# Allegro board rpi-picow-r3-2.brd
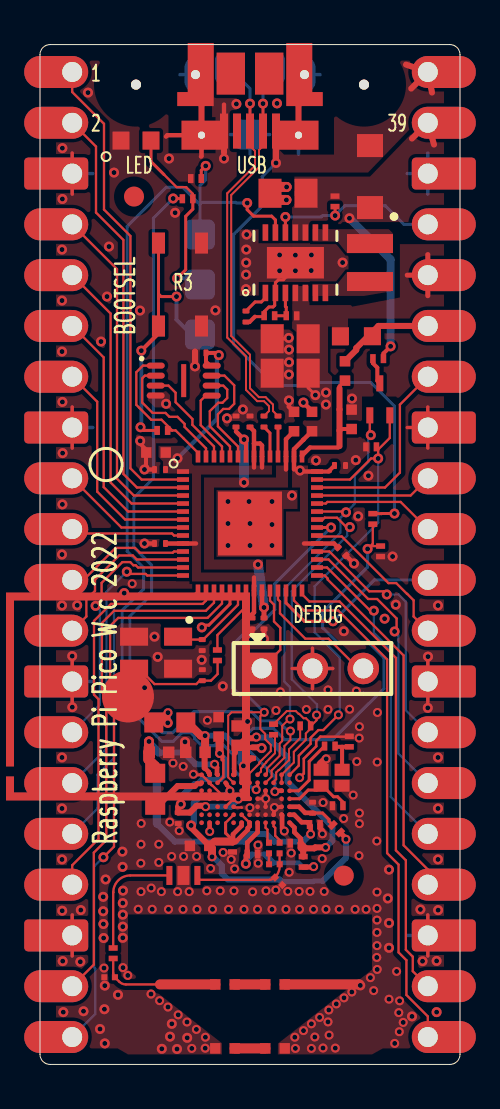
[diagram p0: board, top side]
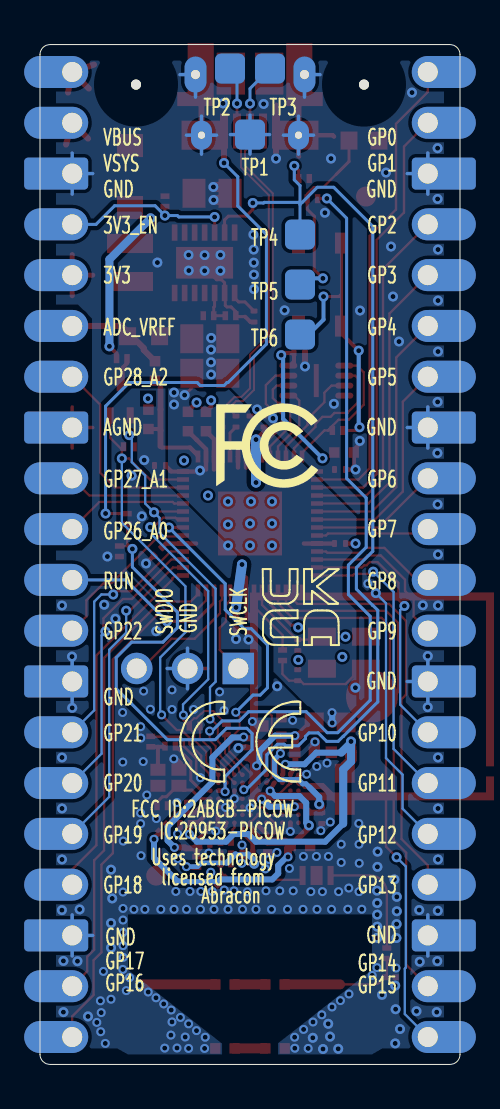
[diagram p1: board, bottom side, seen from below]

Outline 21 x 51 mm; copper layers: TOP, GNDT, GNDB, BOTTOM. Coordinates in mm from the lower left corner of the outline.
Outline path: 0,50.5 0,0.5 arc(0.15,0.15) 0.5,0 20.5,0 arc(20.85,0.15) 21,0.5 21,50.5 arc(20.85,50.85) 20.5,51 0.5,51 arc(0.15,50.85) 0,50.5

## Design rules (mm)
constraint set DEFAULT: min track width 0.1, pair gap 0.1
net group USB: nets USB_DM USB_DP
nets with their own width: min track width 0.115; nets GPIO0 GPIO1 GPIO2 GPIO3 GPIO4 GPIO5 GPIO6 GPIO7 GPIO8 GPIO9 GPIO10 GPIO11 GPIO12 GPIO13 GPIO14 GPIO15 GPIO16 GPIO17 GPIO18 GPIO19 GPIO20 GPIO21 GPIO22 GPIO26_ADC0 GPIO27_ADC1 GPIO28_ADC2 N1248345 N1248352 N1283798 N1286133 N1327876 N2601398 N2601406 N2601542 N2601582 N2601656 N2601706 N2601714 N2606814 N2606818 N2606882 N2610223 N2612153 N2624340 QSPI_SCLK QSPI_SD0 QSPI_SD1 QSPI_SD2 QSPI_SD3 QSPI_SS RUN SWCLK SWDIO WL_CLK WL_GPIO1 WL_GPIO2 XIN XOUT XR
nets with their own width: min track width 0.145; nets USB_DMX USB_DPX
nets with their own width: nets BT_PAVDD VDDBAT VSYS
nets with their own width: min track width 0.23; nets SR_VLX VIN_LDO VOUT_3P3

## Placement (name value [footprint] x y rotation side)
C1  47u  [CAPC2012]  12.4 43.57 180 top
C2  47u  [CAPC2012]  12.51 36.29 180 top
C4  100n  [M0603_PICO]  6 29.75 180 top
C5  100n  [M0603_PICO]  6 26.05 180 top
C6  100n  [M0603_PICO]  15.1 25.65 315 top
C7  100n  [M0603_PICO]  15 29.95 0 top
C8  100n  [M0603_PICO]  10.6 22.05 270 top
C9  100n  [M0603_PICO]  11.2 22.05 270 top
C10  100n  [M0603_PICO]  10.5 32.15 90 top
C11  100n  [M0603_PICO]  9.8 32.15 90 top
C12  2.2u  [CAPC1005]  12.7 32.15 90 top
C13  2.2u  [CAPC1005]  15.58 32.26 90 top
C14  2.2u  [CAPC1005]  13.6 32.15 90 top
C15  100n  [M0603_PICO]  8.02 35.58 180 top
C16  15p  [M0603_PICO]  8.11 20.97 270 top
C17  15p  [M0603_PICO]  8.12 19.46 90 top
C18  2.2u  [CAPC1005]  5.8 30.6 180 top
C20  100n  [M0603_PICO]  10.3 37.4 270 top
C21  47u  [CAPC2012]  12.51 34.57 180 top
C240  4.7u  [CAPC1005X55N]  7.77 15.61 180 top
C241  4.7u  [CAPC1005X55N]  5.95 15.61 0 top
C242  1u  [CAPC0603]  13.74 12 0 top
C243  4.7u  [CAPC1005X55N]  9.86 16.44 90 top
C244  1u  [CAPC0603]  12.77 11.06 180 top
C245  1u  [CAPC0603]  10.63 10.52 0 top
C246  2.2u  [CAPC1005]  7.98 10.93 180 top
C247  NF  [RF0603]  11.93 9.16 135 top
C248  2.2u  [CAPC1005]  8.93 16.88 90 top
C249  10p  [RF0603]  11.98 10.82 90 top
C250  10p  [RF0603]  11.72 10.01 180 top
C251  100n  [M0603_PICO]  13.63 12.84 90 top
C252  1u  [CAPC0603]  9.63 10.88 270 top
C255  100n  [M0603_PICO]  6.91 12.32 270 top
C256  100n  [M0603_PICO]  10.63 15.58 90 top
C257  18p  [SONY0603]  14.88 12.93 180 top
C258  18p  [SONY0603]  15.47 16.14 90 top
C260  XpF  [CAPC1005]  11.75 0.8 180 top
C261  XpF  [CAPC1005]  11.75 4 0 top
C262  XpF  [CAPC1005]  9.25 4 180 top
C271  XpF  [CAPC1005]  9.25 0.8 180 top
C272  NF  [RF0603]  3.48 4.36 180 top
D1  MBR120VLSFT1G  [SOD123FL]  16.5 44.4 90 top
D2  Green  [AVAGO_QSM]  4.8 46.2 0 top
FB8  600@100MHz  [CAPC1608X90N]  6.49 17.1 0 top
FB9  600@100MHz  [SONY0603]  14.82 11.79 135 top
FL1  LFB212G45CG7D227  [FILS3_MUR_LFB21XXCG2Q]  7.17 9.45 0 top
J0  CON_PICO_40W-notfitted  [CON_PICO_40W]  10.5 25.5 0 top
J1  690-005-298-486  [FCI_10103594-0001LF]  10.5 49.5 180 top
J2  CON_PICO_3W-notfitted  [BLKCON100VHTM1SQSW1003]  11.08 19.8 0 top
L1  1u  [BOURNS_SRN2512]  16.5 40.1 270 top
L8  2.2u  [CAPC1608X90N]  5.76 13.76 90 top
L9  4.7n  [RF0603]  11.45 10.82 90 top
MH1  Mounting Hole  [MH_M2_PTH_SYM]  4.8 2 0 top
MH2  Mounting Hole  [MH_M2_PTH_SYM]  16.2 2 0 top
NOREF  -  []  0.55 0 90 top
NOREF#2  -  [unnamed#2]  4.7 43.4 0.1 top
NOREF#3  -  []  -0.79 3.11 90 top
NOREF#4  -  []  0.15 8.2 90 top
NOREF#5  -  []  -15 87 0 top
NOREF#6  -  []  65 0 0 top
NOREF#7  -  [unnamed#3]  16.2 49 0 top
NOREF#8  -  []  15.2 49 90 top
NOREF#9  -  []  1.61 1.37 90 top
NOREF#10  -  []  13.62 19.8 0 top
NOREF#11  -  []  0 50.5 0 top
NOREF#12  -  []  -0.79 0.57 0 top
NOREF#13  -  []  2.41 3.91 0 top
NOREF#14  -  []  21.49 39.47 0 top
NOREF#15  -  []  2.32 7.22 0 top
NOREF#16  -  []  1.61 49.63 0 top
NOREF#17  -  []  64 31 0 top
NOREF#18  -  []  -0.79 0.57 90 top
NOREF#19  -  []  2.21 14.6 0 top
NOREF#20  -  []  4.8 49 0 top
NOREF#21  -  []  -0.79 0.57 0 top
NOREF#22  -  []  19.89 34.39 0 top
NOREF#23  -  [unnamed#2]  15.19 9.44 0.1 top
NOREF#24  -  []  0 1.35 0 top
NOREF#25  -  []  5.2 1.03 0 top
NOREF#26  -  []  0 0 90 top
NOREF#27  -  []  1.61 34.39 90 top
NOREF#28  -  []  16.2 0 90 top
NOREF#29  -  [unnamed#2]  4.8 49 0 top
NOREF#30  -  []  17.5 0 90 top
NOREF#31  -  []  6.5 51.1 0 top
NOREF#32  -  []  -0.79 2.17 90 top
NOREF#33  -  []  12.9 51 90 top
NOREF#34  -  []  36.22 -0.1 180 bottom
Q1  DMG1012T  [SOT50P160X90-3N]  16.99 33.26 90 top
R1  10K  [SONY0603]  17.03 25.66 270 top
R2  100K  [RESC0603]  14.75 43.16 270 top
R3  470R  [SONY0603]  7.38 43.29 0 top
R5  20K  [SONY0603]  16.91 35.3 180 top
R6  10K  [SONY0603]  16.56 30.88 180 top
R7  200R  [RESC1608]  15.82 36.41 0 top
R8  100K  [RESC0603]  7.8 44.3 180 top
R9  1R  [RESC1005]  15.25 34.68 270 top
R10  10K  [SONY0603]  16.64 27.28 270 top
R11  1K  [SONY0603]  6.12 31.7 0 top
R12  27R  [M0603_PICO]  11.2 32.15 270 top
R13  27R  [M0603_PICO]  11.9 32.15 270 top
R14  1K  [SONY0603]  8.87 20.46 270 top
R20  100K  [RESC0603]  11.47 37.44 180 top
R21  560K  [RESC0603]  12.57 37.44 180 top
R80  22R  [SONY0603]  13.16 10.13 270 top
R81  220R  [SONY0603]  14.49 15.92 180 top
R86  0R  [SONY0603]  3.66 5.56 90 top
R87  470R  [SONY0603]  13.27 16.93 0 top
R88  10K  [SONY0603]  11.68 16.75 90 top
SH1  SHJJ-031306  [RF_SHIELD_PICOW]  4.4 8 0 top
SW1  TP-1221U-K9K5325  [TONEPARTS_TP-1221U-K9K5325]  7 39 90 top
TP1  SQ1P5MM  [TP_SMT_1P5X1P5MM]  10.5 46.5 180 bottom
TP2  SQ1P5MM  [TP_SMT_1P5X1P5MM]  11.5 49.8 180 bottom
TP3  SQ1P5MM  [TP_SMT_1P5X1P5MM]  9.5 49.8 180 bottom
TP4  SQ1P5MM  [TP_SMT_1P5X1P5MM]  8 41.5 180 bottom
TP5  SQ1P5MM  [TP_SMT_1P5X1P5MM]  8 39 180 bottom
TP6  SQ1P5MM  [TP_SMT_1P5X1P5MM]  8 36.5 180 bottom
U1  RP2040  [RPI_RP2040]  10.5 27.05 0 top
U2  RT6154AGQW  [RT-WDFN-14AL]  12.77 40.09 90 top
U3  W25Q16JVUXIQ  [USON_2X3MM]  7.18 34.2 0 top
U19  CYW43439KUBG  [BROADCOM_BCM43438]  10.28 13.28 90 top
X1  12MHz  [XTAL320X250X100]  5.8 20.59 180 top
X2  37.4MHz  [XTALS4_1M6X1M2]  14.58 14.34 90 top

## Library data of the parts
C1 C2 C4-C18 C20 C21 C244 C245 C255 C256 = CAP_MLCC
C240 C241 C243 = CAP_1005_6.3V_4.7u
C242 C252 = CAP_0603_4V_1u
C246 C248 = CAP_1005_6V3_2.2u
C247 C272 = CAP_0603_NF
C249 C250 C260-C262 C271 = CAP_0603_25V_10p
C251 = CAP_0603_6.3V_100n
C257 C258 = CAP_0603_25V_27p
D1 = DIODE_SCHOTTKY
D2 = LED_2PIN
FB8 = FB_1608_600R
FB9 = FB_0603_600R
FL1 = FILT_LFB212G45CG7D227
J0 = CON_PICO_40W
J1 = CON_uUSB_B
J2 = CON_PICO_3W
L1 = INDUCTOR
L8 = IND_CHIP_2.2U_1608
L9 = IND_CHIP_4N7_0603
MH1 MH2 = Mounting Hole
Q1 = MOSFET_N
R1-R3 R5-R14 R20 R21 R87 = RES_CHIP
R80 = RES_0603_22R
R81 R86 R88 = RES_0603_220R
SH1 = SHIELDCAN_1PIN
SW1 = SW_PB_4PIN
TP1-TP6 = TP_SMT_SQUARERC_1P5MM
U1 = RPI_RP2040
U2 = RT6154B
U3 = WINBOND_W25X_QSPI_FLASH_USON
U19 = BCM43438KUBG
X1 = CRYSTAL_4P
X2 = XTAL_SMT_1P6X1P2_37.4MHZ

## Footprints (pads in the part's own frame, mm; a bottom-side part is the same pattern mirrored in y, then rotated)
AVAGO_QSM
  rect 0.85x0.9 smd: 1(-0.75,0) 2(0.75,0)
BLKCON100VHTM1SQSW1003
  rect 1.575x1.575 hole 1: 1(0,0)
  round 1.575 hole 1: 2(2.54,0) 3(5.08,0)
BOURNS_SRN2512
  rect 0.95x2.3 smd: 1(-0.95,0) 2(0.95,0)
BROADCOM_BCM43438
  round 0.235 smd: A1(-1.2,2.2) A2(-0.8,2.2) A5(0.4,2.2) A6(0.8,2.2) A7(1.2,2.2) B1(-1.2,1.8) B2(-0.8,1.8) B4(0,1.8) B5(0.4,1.8) B6(0.8,1.8) B7(1.2,1.8) C1(-1.2,1.4) C2(-0.8,1.4) C3(-0.4,1.4) C4(0,1.4) C6(0.8,1.4) C7(1.2,1.4) D2(-0.8,1) D3(-0.4,1) D4(0,1) D6(0.8,1) E1(-1.2,0.6) E2(-0.8,0.6) E3(-0.4,0.6) E6(0.8,0.6) E7(1.2,0.6) F1(-1.2,0.2) F2(-0.8,0.2) F5(0.4,0.2) F6(0.8,0.2) F7(1.2,0.2) G1(-1.2,-0.2) G2(-0.8,-0.2) G4(0,-0.2) G6(0.8,-0.2) H1(-1.2,-0.6) H2(-0.8,-0.6) H3(-0.4,-0.6) H4(0,-0.6) H6(0.8,-0.6) H7(1.2,-0.6) J1(-1.2,-1) J2(-0.8,-1) J3(-0.4,-1) J5(0.4,-1) J6(0.8,-1) J7(1.2,-1) K1(-1.2,-1.4) K2(-0.8,-1.4) K6(0.8,-1.4) L2(-0.8,-1.8) L3(-0.4,-1.8) L4(0,-1.8) L5(0.4,-1.8) L6(0.8,-1.8) L7(1.2,-1.8) M1(-1.2,-2.2) M2(-0.8,-2.2) M3(-0.4,-2.2) M4(0,-2.2) M5(0.4,-2.2) M6(0.8,-2.2) M7(1.2,-2.2)
CAPC0603
  rect 0.275x0.45 smd: 1(-0.262,0) 2(0.262,0)
CAPC1005
  rect 0.52x0.53 smd: 1(-0.485,0) 2(0.485,0)
CAPC1005X55N
  rect 0.57x0.58 smd: 1(-0.485,0) 2(0.485,0)
CAPC1608X90N
  rect 0.95x1 smd: 1(-0.8,0) 2(0.8,0)
CAPC2012
  rect 1.15x1.45 smd: 1(-0.9,0) 2(0.9,0)
CON_PICO_40W
  oval 3.2x1.6 hole 1: 1(-8.89,24.13) 2(-8.89,21.59) 4(-8.89,16.51) 5(-8.89,13.97) 6(-8.89,11.43) 7(-8.89,8.89) 9(-8.89,3.81) 10(-8.89,1.27) 11(-8.89,-1.27) 12(-8.89,-3.81) 14(-8.89,-8.89) 15(-8.89,-11.43) 16(-8.89,-13.97) 17(-8.89,-16.51) 19(-8.89,-21.59) 20(-8.89,-24.13) 21(8.89,-24.13) 22(8.89,-21.59) 24(8.89,-16.51) 25(8.89,-13.97) 26(8.89,-11.43) 27(8.89,-8.89) 29(8.89,-3.81) 30(8.89,-1.27) 31(8.89,1.27) 32(8.89,3.81) 34(8.89,8.89) 35(8.89,11.43) 36(8.89,13.97) 37(8.89,16.51) 39(8.89,21.59) 40(8.89,24.13)
  rrect 3.2x1.6 hole 1: 3(-8.89,19.05) 8(-8.89,6.35) 13(-8.89,-6.35) 18(-8.89,-19.05) 23(8.89,-19.05) 28(8.89,-6.35) 33(8.89,6.35) 38(8.89,19.05)
FCI_10103594-0001LF
  rect 1.42x2.1 smd: (-0.96,-0.05) (0.96,-0.05)
  rect 0.4x1.75 smd: 1(-1.3,2.825) 2(-0.65,2.825) 3(0,2.825) 4(0.65,2.825) 5(1.3,2.825)
  custom 2x1.45 hole 1.05x0.65: 6(-2.425,3.03) 8(2.425,3.03)
  custom 1.825x3.15 hole 0.7x1.4: 7(-2.725,0) 9(2.725,0)
FILS3_MUR_LFB21XXCG2Q
  rect 0.6x0.95 smd: G(0,0)
  rect 0.3x0.95 smd: I(-0.7,0) O(0.7,0)
M0603_PICO
  rrect 0.25x0.35 smd: 1(-0.275,0) 2(0.275,0)
MH_M2_PTH_SYM
  round 0 hole 2.1: 1(0,0)
RESC0603
  rect 0.275x0.45 smd: 1(-0.262,0) 2(0.262,0)
RESC1005
  rect 0.52x0.53 smd: 1(-0.485,0) 2(0.485,0)
RESC1608
  rect 0.85x0.9 smd: 1(-0.8,0) 2(0.8,0)
RF0603
  rect 0.3x0.3 smd: 1(-0.265,0) 2(0.265,0)
RF_SHIELD_PICOW
  custom 12.2x10.4 smd: 1(0,10.4)
RPI_RP2040
  rect 0.6x0.23 smd: 1(-3.35,2.6) 2(-3.35,2.2) 3(-3.35,1.8) 4(-3.35,1.4) 5(-3.35,1) 6(-3.35,0.6) 7(-3.35,0.2) 8(-3.35,-0.2) 9(-3.35,-0.6) 10(-3.35,-1) 11(-3.35,-1.4) 12(-3.35,-1.8) 13(-3.35,-2.2) 14(-3.35,-2.6) 29(3.35,-2.6) 30(3.35,-2.2) 31(3.35,-1.8) 32(3.35,-1.4) 33(3.35,-1) 34(3.35,-0.6) 35(3.35,-0.2) 36(3.35,0.2) 37(3.35,0.6) 38(3.35,1) 39(3.35,1.4) 40(3.35,1.8) 41(3.35,2.2) 42(3.35,2.6)
  rect 0.23x0.6 smd: 15(-2.6,-3.35) 16(-2.2,-3.35) 17(-1.8,-3.35) 18(-1.4,-3.35) 19(-1,-3.35) 20(-0.6,-3.35) 21(-0.2,-3.35) 22(0.2,-3.35) 23(0.6,-3.35) 24(1,-3.35) 25(1.4,-3.35) 26(1.8,-3.35) 27(2.2,-3.35) 28(2.6,-3.35) 43(2.6,3.35) 44(2.2,3.35) 45(1.8,3.35) 46(1.4,3.35) 47(1,3.35) 48(0.6,3.35) 49(0.2,3.35) 50(-0.2,3.35) 51(-0.6,3.35) 52(-1,3.35) 53(-1.4,3.35) 54(-1.8,3.35) 55(-2.2,3.35) 56(-2.6,3.35)
  rect 3.2x3.2 smd: 57(0,0)
RT-WDFN-14AL
  rect 0.82x0.28 smd: 1(-1.51,1.5) 2(-1.51,1) 3(-1.51,0.5) 4(-1.51,0) 5(-1.51,-0.5) 6(-1.51,-1) 7(-1.51,-1.5) 8(1.51,-1.5) 9(1.51,-1) 10(1.51,-0.5) 11(1.51,0) 12(1.51,0.5) 13(1.51,1) 14(1.51,1.5)
  rect 1.58x2.85 smd: 15(0,0)
SOD123FL
  rect 1.15x1.3 smd: 1(-1.55,0) 2(1.55,0)
SONY0603
  rect 0.275x0.45 smd: 1(-0.262,0) 2(0.262,0)
SOT50P160X90-3N
  rect 0.8x0.35 smd: 1(-0.8,0.5) 2(-0.8,-0.5) 3(0.8,0)
TONEPARTS_TP-1221U-K9K5325
  rect 1.05x0.65 smd: 1(-2.075,1.075) 2(2.075,1.075) 3(-2.075,-1.075) 4(2.075,-1.075)
TP_SMT_1P5X1P5MM
  rrect 1.5x1.5 smd: 1(0,0)
unnamed#2
  round 1 smd: (0,0)
unnamed#3
  round 0.5 hole 2.1 unplated: (0,0)
USON_2X3MM
  oval 0.9x0.3 smd: 1(-1.4,0.75) 2(-1.4,0.25) 3(-1.4,-0.25) 4(-1.4,-0.75) 5(1.4,-0.75) 6(1.4,-0.25) 7(1.4,0.25) 8(1.4,0.75)
  rect 0.25x1.65 smd: 9(0,0)
XTAL320X250X100
  rect 1.4x0.9 smd: 1(-1.1,-0.8) 2(1.1,-0.8) 3(1.1,0.8) 4(-1.1,0.8)
XTALS4_1M6X1M2
  rect 0.6x0.75 smd: 1(-0.4,0.525) 2(-0.4,-0.525) 3(0.4,-0.525) 4(0.4,0.525)

## Nets
1V1: C9.1 C11.1 C12.1 U1.23 U1.45 U1.50
3V3: C2.1 C4.1 C5.1 C6.1 C7.1 C8.1 C10.1 C14.1 C15.1 C18.1 C21.1 FB8.1 J0.36 R7.1 R21.1 U1.1 U1.10 U1.22 U1.33 U1.42 U1.44 U1.48 U1.49 U2.4 U2.5(VOUTB) U3.8
3V3_EN: J0.37 R2.2 U2.12
GND: C1.2 C2.2 C4.2 C5.2 C6.2 C7.2 C8.2 C9.2 C10.2 C11.2 C12.2 C13.2 C14.2 C15.2 C16.2 C17.2 C18.2 C20.2 C21.2 C240.2 C241.2 C242.2 C243.2 C244.2 C245.2 C246.2 C247.1 C248.2 C251.2 C252.2 C255.2 C256.2 C257.2 C258.2 C260.1 C261.2 C271.2 C272.2 D2.1(CATHODE) FL1.G J0.3 J0.8 J0.13 J0.18 J0.23 J0.28 J0.33 J0.38 J1.5 J1.6 J1.7 J1.8 J1.9(SH4) J2.2 MH1.1 MH2.1 R1.2 R6.2 R8.2 R20.2 SH1.1 SW1.3 SW1.4(P4) TP1.1 U1.19 U1.57 U2.2 U2.15 U3.4 U19.A7 U19.B1 U19.B6 U19.D4 U19.E3 U19.G2 U19.H2 U19.H3 U19.H4 U19.J2 U19.J3 U19.J5 U19.K2 U19.L2 U19.L3 U19.L4 X1.2 X1.4(GND2) X2.2 X2.4(GND2)
VBUS: D1.2 J0.40 J1.1 R10.1
VDDBAT: C240.1 C256.1 FB8.2 U19.B7 U19.F6 U19.F7
VIN_LDO: C241.1 C242.1 L8.2 U19.C7 U19.M2
ADC_AVDD: C13.1 R9.2 U1.43
ADC_VREF: J0.35 R7.2 R9.1
BT_PAVDD: C245.1 R80.2 U19.H1
GPIO0: J0.1 U1.2
GPIO1: J0.2 U1.3
GPIO2: J0.4 U1.4
GPIO3: J0.5 U1.5
GPIO4: J0.6 U1.6
GPIO5: J0.7 U1.7
GPIO6: J0.9(P9) U1.8
GPIO7: J0.10 U1.9
GPIO8: J0.11 U1.11
GPIO9: J0.12 U1.12
GPIO10: J0.14 U1.13
GPIO11: J0.15 U1.14
GPIO12: J0.16 U1.15
GPIO13: J0.17 U1.16
GPIO14: J0.19 U1.17
GPIO15: J0.20 U1.18
GPIO16: J0.21 U1.27
GPIO17: J0.22 U1.28
GPIO18: J0.24 U1.29
GPIO19: J0.25 U1.30
GPIO20: J0.26 U1.31
GPIO21: J0.27 U1.32
GPIO22: J0.29 U1.34
GPIO26_ADC0: J0.31 U1.38
GPIO27_ADC1: J0.32 U1.39
GPIO28_ADC2: J0.34 U1.40
QSPI_SCLK: U1.52 U3.6
QSPI_SD0: U1.53 U3.5
QSPI_SD1: U1.55 U3.2
QSPI_SD2: U1.54 U3.3(W\P\_IO2)
QSPI_SD3: U1.51 U3.7
QSPI_SS: R11.2 U1.56 U3.1
RUN: J0.30 U1.26
SR_VLX: L8.1 U19.A6
SWCLK: J2.1 U1.24
SWDIO: J2.3(P3) U1.25
USB_DM: J1.2 R13.1 TP2.1
USB_DMX: R13.2 U1.46
USB_DP: J1.3 R12.1 TP3.1
USB_DPX: R12.2 U1.47
VOUT_3P3: C243.1 C244.1 R80.1 U19.E7 U19.M1
VOUT_CORE: C248.1 C255.1 U19.C6 U19.D3 U19.G4
VOUT_LN: C246.1 C252.1 FB9.1 U19.D6 U19.E2 U19.F1 U19.F2 U19.G1
VSYS: C1.1 D1.1(K) J0.39 R2.1 R5.1 U2.10 U2.11
WL_CLK: Q1.2(S) R6.1 U1.41 U19.M7
WL_CS: Q1.1 U1.37 U19.J7
WL_D: R87.2 R88.2 U1.36 U19.L6 U19.L7
WL_GPIO0: R3.1 U19.J6
WL_GPIO1: R8.1 TP4.1 U2.13 U19.H6
WL_GPIO2: R1.1 R10.2 U19.L5
WL_ON: U1.35 U19.E6 U19.G6
XIN: C16.1 U1.20 X1.1
XOUT: R14.1 U1.21(XOUT)
XR: C17.1 R14.2 X1.3
XTAL_VDD: C251.1 FB9.2 U19.M3(XTAL_VDD_1P2)
N1248345: L1.1 U2.8 U2.9
N1248352: L1.2 U2.6 U2.7
N1283798: D2.2 R3.2 TP5.1
N1286133: Q1.3 R5.2
N1327876: R11.1 SW1.1 SW1.2 TP6.1
N2601398: C247.2 C249.1 C250.1 FL1.O(OUT)
N2601406: C249.2 U19.K1
N2601542: C250.2 L9.1
N2601582: L9.2 U19.J1
N2601656: C257.1 U19.M4 X2.1
N2601706: C258.1 R81.1 X2.3
N2601714: R81.2 U19.M5
N2606814: C261.1 C262.1
N2606818: C262.2 C272.1 R86.1
N2606882: C260.2 C271.1
N2610223: C20.1 U2.1
N2612153: R20.1 R21.2 U2.3
N2624340: FL1.I R86.2
N2651978: R87.1 U19.K6
N2652088: R88.1 U19.H7

Pads without a net: J1 4; U2 14; U3 9; U19 A1 A2 A5 B2 B4 B5 C1 C2 C3 C4 D2 E1 F5 M6

## Via types
v1: diameter 0.5, hole 0.25, TOP to BOTTOM, 171 vias
v2: diameter 0.45, hole 0.25, TOP to BOTTOM, 151 vias

## Routing (per net, layer and track width the routed paths; a pad name or vN(x,y) marks a point on that pad's centre or on a via; arc(x,y) is an arc through that point)
1V1: length 9.5
  TOP w0.15: C11.1 9.8,31.65
  TOP w0.2: U1.50 10.3,31.15 v1(10.2,31.25) ; v1(11.2,22.85) 11.1,22.95
  TOP w0.22: 12.3,29.75 U1.45 12.3,31.27 12.7,31.66 C12.1 ; 11.1,22.95 U1.23 ; 9.8,31.65 v1(10.2,31.25)
  TOP w0.25: C9.1 v1(11.2,22.85)
  BOTTOM w0.5: v1(10.9,25) v1(11.2,22.85) ; v1(10.2,31.25) v1(10.2,29.1)
3V3: length 26.9
  TOP w0.15: C21.1 13.41,33.83 v1(13.77,33.47)
  TOP w0.2: U3.8 8.5,34.95 8.3,35.15 C15.1 8.77,35.58 8.88,35.47 v1(8.94,35.47) ; U1.42 14.42,29.65 14.44,29.66 14.49,29.66 14.49,29.71 C7.1
  TOP w0.22: C10.1 10.5,31.88 10.7,31.68 10.7,31.05 ; 10.7,24.35 U1.22 10.7,22.6 10.6,22.5 C8.1 ; 10.7,31.05 11,31.05 11.1,30.95 U1.48 11.1,29.85 ; 10.7,31.05 U1.49 10.7,29.85 ; 7.8,26.05 U1.10 C5.1 ; 12.7,29.75 U1.44 12.7,30.77 13.17,31.23 13.17,31.24 13.6,31.66 13.6,31.66 C14.1 ; U1.42 13.2,29.65 ; C6.1 14.7,26.05 U1.33 13.2,26.05
  TOP w0.25: J0.36 19.39,40.5 ; J0.36 18.36,39.47 ; J0.36 19.39,38.44
  TOP w0.3: 5.79,17.21 5.96,17.37 ; 5.96,17.37 6.26,17.37 ; 5.96,17.37 5.99,17.4 6.21,17.4 v2(6.4,17.59)
  TOP w0.5: v2(6.39,17.08) 6.26,17.21 6.26,17.37 ; FB8.1 5.79,17.21
  BOTTOM w0.2: v1(6.88,30.31) 8.85,32.28 8.85,35.38 v1(8.94,35.47)
  BOTTOM w0.3: v2(6.39,17.08) 6.39,17.58 v2(6.4,17.59)
  vias: v1(13,29.7) v1(14.3,33.6) v1(14.3,33)
3V3_EN: length 9
  TOP w0.15: R2.2 14.76,42.89 v1(14.76,42.45) ; U2.12 v1(12.27,42.38)
  BOTTOM w0.15: J0.37 18.2,42.01 17.27,42.94 15.24,42.94 v1(14.76,42.45) 14.13,42.45 14.06,42.38 v1(12.27,42.38)
GND: length 179.4
  TOP w0.12: 10.09,12.84 10.08,12.85 9.71,12.85 U19.E3 ; U19.D4 8.6,13.97 8.58,13.97 ; U19.B6 8.08,14.49
  TOP w0.127: v2(12.98,14.34) 13.19,14.55 13.19,15.29 13.81,15.91 13.81,16.18 14.02,16.39 15.45,16.39 C258.2 ; U19.B6 8.48,14.06 8.58,13.97
  TOP w0.15: 11.28,13.28 v2(11.29,13.29) ; 11.28,13.28 U19.J3 ; 11.28,13.28 U19.J5 ; 11.28,13.28 U19.H4 ; C2.2 12.21,36.29 12.21,36.3 12.41,36.3 v1(12.44,36.33) ; 7.69,14.49 8.08,14.49 U19.A7 ; 10.74,37.39 11.16,37.39 R20.2 11.21,37.64 11.45,37.88 11.65,37.88 11.74,37.96 11.74,38.55 U2.2 11.77,39.09 11.92,39.24 12.17,39.24 12.44,39.51 12.44,39.76 U2.15 ; U1.19 9.5,23.03 8.44,21.96 8.2,21.96 v1(8.09,21.85)
  TOP w0.17: 1.61,18.12 J0.13 1.61,20.18 ; 19.39,18.12 J0.28 19.39,20.18 ; 1.61,43.52 J0.3 1.61,45.58 ; 19.39,5.42 J0.23 19.39,7.48 ; J0.33 19.39,32.88 ; J0.33 19.39,30.82 ; J0.33 18.36,31.85 ; J1.8 8.83,46.47 ; J1.8 8.08,45.52 ; J1.8 6.37,46.47 ; 12.61,19.8 J2.2 ; J2.2 13.62,18.78 ; J2.2 14.64,19.8 ; J2.2 13.62,20.82 ; 1.61,30.82 J0.8 1.61,32.88 ; 1.61,7.48 J0.18 1.61,5.42
  TOP w0.178: 14.41,2.63 14.41,2.75 v2(14.44,2.72) ; 12.08,11.76 12.17,11.67 v2(12.22,11.67)
  TOP w0.2: 11.77,12.84 U19.L3 ; 5.3,29.86 5.3,30.58 C18.2 5.32,30.73 5.01,31.04 v1(5.01,31.18) ; U19.K2 11.68,12.49 11.72,12.8 ; C20.2 10.47,37.12 10.74,37.39
  TOP w0.22: 6.3,46.4 6.37,46.47 8.07,46.47 8.07,45.43 8.05,45.4 ; C4.2 v1(5.22,29.75) ; 15.6,25.15 C6.2 ; C12.2 12.45,32.89 v1(12.45,33.2) ; v1(13.17,33.1) 13.6,32.67 C14.2 ; J1.5 9.2,48 ; C5.2 v1(5.22,26.05)
  TOP w0.23: U19.B1 8.48,11.65 v2(8.48,11.65) ; U19.L2 12.08,12.49 12.1,12.46 12.1,11.79
  TOP w0.25: v2(14.12,11.53) 14.12,11.67 14.11,11.68 14.11,11.7 14,11.81 C242.2 ; C9.2 v1(11.2,21.27) ; v1(10.57,21.25) 10.6,21.27 C8.2
  TOP w0.3: v1(7.75,34.9) C15.2 7.75,35.65 ; 5.3,29.86 5.32,29.84 v1(5.22,29.75) ; 8.07,46.47 8.07,49.2 7.77,49.5 J1.9 ; 8.07,46.47 J1.8 ; 8.07,46.47 8.28,46.67 J1.5 9.2,45.6 ; v1(11.08,15.82) 11.03,15.82 11.02,15.83 10.95,15.83 10.92,15.86 C256.2 ; 13.04,46.59 J1.6 12.93,49.2 J1.7
  TOP w0.4: X2.4 14.06,15.03 v2(14.31,15.28)
  TOP w0.5: C261.2 15.96,4 v2(16.02,3.95) ; 7.25,15.79 v2(7.25,16.13) ; v1(12.33,43.88) 11.81,43.88 C1.2 11.83,43.23 v1(12.32,43.23)
  GNDT w0.12: J0.13 2.59,19.15 ; J0.13 1.61,20.13 ; J0.13 1.61,18.17 ; 1.61,43.57 J0.3 ; J0.3 2.59,44.55 ; J0.3 1.61,45.53 ; 1.61,30.87 J0.8 ; J0.8 2.59,31.85 ; J0.8 1.61,32.83 ; J0.38 19.39,45.53 ; J0.38 19.39,43.57 ; J0.38 18.41,44.55 ; J0.33 19.39,32.83 ; J0.33 19.39,30.87 ; J0.33 18.41,31.85 ; J1.8 8.78,46.47 ; J1.8 8.08,47.37 ; J1.8 8.08,45.57 ; J1.8 7.37,46.47 ; J1.6 13.63,46.47 ; J1.6 12.22,46.47 ; J1.6 12.93,45.57 ; J1.6 12.93,47.37 ; 7.05,49.5 J1.9 ; J1.9 7.78,48.42 ; J1.9 8.5,49.5 ; 18.41,6.45 J0.23 ; J0.23 19.39,7.43 ; J0.23 19.39,5.47 ; 19.39,18.17 J0.28 ; J0.28 18.41,19.15 ; J0.28 19.39,20.13 ; 1.61,5.47 J0.18 ; J0.18 1.61,7.43 ; J0.18 2.59,6.45 ; 13.62,18.83 J2.2 ; J2.2 14.59,19.8 ; J2.2 13.62,20.77 ; J2.2 12.66,19.8 ; 13.22,48.42 J1.7 ; J1.7 13.95,49.5 ; J1.7 12.5,49.5
  GNDB w0.12: 19.39,43.57 J0.38 ; J0.38 18.41,44.55 ; J0.38 19.39,45.53 ; J0.3 1.61,45.53 ; J0.3 1.61,43.57 ; J0.3 2.59,44.55 ; 12.5,49.5 J1.7 ; J1.7 13.95,49.5 ; J1.7 13.22,48.42 ; J0.8 2.59,31.85 ; J0.8 1.61,32.83 ; J0.8 1.61,30.87 ; J0.13 1.61,20.13 ; J0.13 1.61,18.17 ; J0.13 2.59,19.15 ; J0.18 1.61,7.43 ; J0.18 1.61,5.47 ; J0.18 2.59,6.45 ; 19.39,18.17 J0.28 ; J0.28 19.39,20.13 ; J0.28 18.41,19.15 ; 8.08,45.57 J1.8 ; J1.8 7.37,46.47 ; J1.8 8.78,46.47 ; J1.8 8.08,47.37 ; 18.41,6.45 J0.23 ; J0.23 19.39,5.47 ; J0.23 19.39,7.43 ; 12.66,19.8 J2.2 ; J2.2 13.62,20.77 ; J2.2 14.59,19.8 ; J2.2 13.62,18.83 ; 12.93,45.57 J1.6 ; J1.6 12.22,46.47 ; J1.6 12.93,47.37 ; J1.6 13.63,46.47 ; 7.78,48.42 J1.9 ; J1.9 8.5,49.5 ; J1.9 7.05,49.5
  BOTTOM w0.15: 14.25,15.34 v2(14.31,15.28)
  BOTTOM w0.17: 9.52,46.5 TP1.1 ; TP1.1 10.5,47.48 ; TP1.1 10.5,45.52 ; TP1.1 11.48,46.5 ; 1.61,43.52 J0.3 ; J0.3 1.61,45.58 ; J0.3 2.64,44.55 ; J0.23 19.39,7.48 ; J0.23 19.39,5.42 ; J0.23 18.36,6.45 ; J0.8 1.61,32.88 ; J0.8 2.64,31.85 ; J0.8 1.61,30.82 ; 12.17,46.47 J1.6 ; J1.6 12.93,45.52 ; J1.6 12.93,47.42 ; J1.6 13.68,46.47 ; 7,49.5 J1.9 7.78,48.37 ; 1.61,18.12 J0.13 ; J0.13 2.64,19.15 ; J0.13 1.61,20.18 ; 8.08,45.52 J1.8 ; J1.8 8.08,47.42 ; J1.8 8.83,46.47 ; J1.8 7.32,46.47 ; 1.61,5.42 J0.18 1.61,7.48 ; J0.38 19.39,45.58 ; J0.38 18.36,44.55 ; J0.38 19.39,43.52 ; 13.22,48.37 J1.7 14,49.5 ; 19.39,20.18 J0.28 19.39,18.12 ; J2.2 14.64,19.8 ; J2.2 13.62,20.82 ; J2.2 13.62,18.78
  vias: v1(1.12,45.82) v1(1.12,43.28) v1(1.1,40.75) v1(1.1,38.2) v1(1.1,35.65) v1(1.12,33.13) v1(1.13,30.57) v1(1.12,28) v1(1.1,25.5) v1(1.1,22.95) v1(1.1,15.35) v1(1.1,12.8) v1(1.1,10.25) v1(1.11,7.68) v1(1.14,5.17) v1(1.17,2.61) v1(1.61,20.42) v1(1.61,17.87) v1(1.86,22.96) v1(2.04,7.72) v1(2.02,5.14) v1(2.17,2.66) v1(2.4,48.6) v1(3.05,36.15) v1(3,1.77) v1(3.16,8.38) v1(3.16,7.66) v1(3.17,7.02) v1(3.18,6.32) v1(3.24,3.94) v1(3.22,2.76) v1(3.24,1.05) v1(3.28,9.25) v1(3.35,38.4) v1(3.45,40.9) v1(3.7,44.6) v1(3.9,3.48) v1(4.12,10.64) v1(4.13,9.88) v1(4.14,8.07) v1(4.14,7.49) v1(4.14,6.89) v1(4.14,6.33) v1(4.15,8.69) v1(5,37.7) v1(5.23,18.84) v1(5.72,21.39) v1(5.88,20.38) v1(6.09,0.78) v1(6.3,33.03) v1(6.45,45.3) v1(6.5,1.39) v1(6.59,2.03) v1(6.75,42.59) v1(6.85,0.77) v1(7.36,1.33) v1(8.09,20.23) v1(8.77,37.71) v1(9.14,18.91) v1(9.2,45.3) v1(9.35,32.31) v1(9.4,28.15) v1(9.4,27.05) v1(9.4,25.95) v1(9.82,48.03) v1(10.14,32.76) v1(10.33,41.5) v1(10.31,40.75) v1(10.31,40.09) v1(10.3,39.49) v1(10.3,38.77) v1(10.45,28.15) v1(10.5,27.05) v1(10.5,25.95) v1(11.6,28.15) v1(11.6,27) v1(11.6,25.95) v1(11.85,48.06) v1(11.98,40.48) v1(11.98,39.69) v1(12.45,34.5) v1(12.45,35.74) v1(12.45,35.12) v1(12.6,28.45) v1(12.77,40.47) v1(12.77,39.69) v1(13.57,40.48) v1(13.56,39.7) v1(13.8,30.2) v1(15.13,40.1) v1(15.19,21.66) v1(15.6,33.3) v1(15.7,25.05) v1(15.79,30.22) v1(15.91,27.41) v1(16.42,29.44) v1(17.23,22.29) v1(17.45,9.74) v1(17.39,8.3) v1(17.45,7.07) v1(17.45,5.83) v1(17.63,25.4) v1(17.79,22.99) v1(18.6,2.4) v1(19.02,7.75) v1(19.13,5.16) v1(19.4,20.39) v1(19.39,17.83) v1(19.83,5.17) v1(19.83,2.61) v1(19.9,22.95) v1(19.9,15.35) v1(19.9,12.8) v1(19.9,10.25) v1(19.91,7.71) v2(3.2,4.82) v2(4.15,4.84) v2(4.39,4.45) v2(4.61,24.04) v2(4.91,7.76) v2(5.05,11.01) v2(5.04,10.06) v2(5.05,8.64) v2(5.06,12.05) v2(5.55,3.52) v2(5.56,8.82) v2(5.61,7.76) v2(5.94,11.01) v2(5.94,10.1) v2(5.98,3.19) v2(6.07,8.64) v2(6.42,7.76) v2(6.4,2.87) v2(6.49,12.12) v2(6.58,10.4) v2(6.65,15.07) v2(6.88,8.64) v2(6.91,2.48) v2(6.96,11.69) v2(7.16,14.9) v2(7.18,10.4) v2(7.15,7.76) v2(7.35,2.12) v2(7.46,8.64) v2(7.59,0.8) v2(7.67,14.51) v2(7.83,10.4) v2(7.82,1.75) v2(7.85,7.76) v2(8.34,8.68) v2(8.27,1.36) v2(8.26,0.81) v2(8.37,17.21) v2(8.53,9.8) v2(8.63,7.76) v2(9.01,8.68) v2(9.15,10.6) v2(9.42,7.76) v2(9.56,10.25) v2(9.73,9.78) v2(9.7,8.68) v2(10.2,7.76) v2(10.38,17.15) v2(10.5,12.84) v2(10.63,8.63) v2(10.9,10.97) v2(10.91,10.06) v2(10.88,7.76) v2(11.3,8.68) v2(11.6,7.76) v2(11.72,12.85) v2(11.8,17.7) v2(11.79,8.72) v2(12.02,18.63) v2(12.3,7.76) v2(12.39,8.65) v2(12.46,9.61) v2(12.56,10.57) v2(12.74,1.36) v2(12.77,0.8) v2(12.96,8.65) v2(12.98,7.76) v2(13.18,1.69) v2(13.32,17.75) v2(13.5,8.65) v2(13.57,2.03) v2(13.57,0.8) v2(13.68,7.76) v2(13.74,1.37) v2(13.98,2.35) v2(14.11,10.29) v2(14.15,13.1) v2(14.21,8.65) v2(14.15,0.82) v2(14.3,7.76) v2(14.4,18.73) v2(14.4,17.75) v2(14.4,2.12) v2(14.45,1.47) v2(14.82,3.02) v2(14.77,0.82) v2(14.96,7.76) v2(15.18,12.3) v2(15.2,3.33) v2(15.48,17.76) v2(15.59,3.62) v2(15.66,13.47) v2(15.82,18.67) v2(15.84,15.14) v2(15.76,7.76) v2(15.95,10.44) v2(15.97,16.89) v2(15.96,16.32) v2(15.97,12.57) v2(15.97,12.04) v2(16.3,7.76) v2(16.52,4.34) v2(16.68,3.69) v2(16.84,11.17) v2(16.84,5.35) v2(16.87,17.6) v2(16.86,15.12) v2(16.85,8.62) v2(16.85,7.8) v2(16.85,7.22) v2(16.85,6.6) v2(16.85,5.94) v2(16.86,4.75) v2(17.45,3.26) v2(17.73,1.05) v2(17.83,4.65) v2(17.94,2.59) v2(17.98,3.18) v2(17.96,1.64) v2(18.16,2.1)
VBUS: length 30.8
  TOP w0.15: v1(17.72,27.55) 17.08,27.55 17.08,27.54 R10.1
  TOP w0.3: J1.1 v1(11.8,45.08) ; J0.40 19.6,48.6 ; J0.40 18.56,48.8 ; J0.40 18.3,50
  BOTTOM w0.15: v1(17.72,27.55) 17.72,32.92 16.54,34.1 13.14,34.1 12.99,33.95 11.8,33.95 11.65,34.1 11.6,34.1 9.68,36.02 9.68,41.5 11.11,42.93 11.11,44.39 v1(11.8,45.08)
VDDBAT: length 7.8
  TOP w0.23: 8.23,14.83 8.44,14.62 8.44,14.58 8.48,14.54 U19.B7 8.48,14.49 ; U19.F6 U19.F7 10.08,14.84 ; C240.1 8.23,15.59
  TOP w0.25: 10.08,14.84 v2(10.17,14.93)
  TOP w0.3: C256.1 10.54,15.3 v2(10.17,14.93) ; 8.23,15.59 8.23,14.83
  TOP w0.4: 7.3,17.12 7.3,17.01 ; 7.3,17.01 7.47,17.01 8.04,16.44 v2(8.25,16.44) C240.1 ; 7.3,17.01 7.29,17.02 FB8.2
  BOTTOM w0.3: v2(10.17,14.93) 10.03,15.07 10.03,15.66 9.25,16.44 v2(8.25,16.44)
VIN_LDO: length 20.6
  TOP w0.23: v2(13.53,11.52) 13.53,11.94 C242.1 13.36,12.11 13.09,12.11 12.71,12.49 12.48,12.49 U19.M2 ; U19.C7 8.85,14.51 8.85,14.85 8.73,14.97 v2(8.73,15.01)
  TOP w0.3: C241.1 5.45,15.63 5.45,15.64
  TOP w0.5: L8.2 5.75,14.57 5.75,14.92 5.42,15.25 5.42,15.61 5.45,15.64 v1(5.45,16.15)
  BOTTOM w0.3: 5.84,12.04 6.74,11.14 10.21,11.14 10.59,11.52 11.32,11.52 11.7,11.14 13.15,11.14 v2(13.53,11.52) ; 5.94,15.59 7.19,15.59 7.77,15.01 v2(8.73,15.01)
  BOTTOM w0.4: v1(5.45,16.15) 5.45,16.08 ; 5.45,16.08 5.94,15.59 ; 5.45,16.08 5.45,15.14 5.84,14.75 5.84,12.04
ADC_AVDD: length 6.2
  TOP w0.15: 14.98,33.92 R9.2
  TOP w0.2: 14.98,30.92 14.91,30.85 13.5,30.85 ; 14.98,32.74 14.98,32.75 ; 14.98,33.81 14.98,33.92 ; C13.1 15.05,31.78 14.98,31.7
  TOP w0.22: 13.5,30.85 13.1,30.45 U1.43
  TOP w0.3: 14.98,30.92 14.98,33.81
ADC_VREF: length 5.1
  TOP w0.15: R9.1 15.38,35.3 ; 16.62,36.63 R7.2
  TOP w0.3: J0.35 16.92,36.93 16.62,36.63 15.81,35.82 15.81,35.73 15.38,35.3
BT_PAVDD: length 6.8
  TOP w0.23: U19.H1 10.88,11.61 10.36,11.09 C245.1 10.29,10.45 v1(10.29,10.04)
  TOP w0.25: v2(13.68,9.89) 13.66,9.87 R80.2
  BOTTOM w0.2: 11.23,10.51 10.6,10.51
  BOTTOM w0.23: v2(13.68,9.89) 13.12,9.89 12.93,10.08 11.66,10.08
  BOTTOM w0.3: 11.66,10.08 11.23,10.51 ; 10.6,10.51 10.29,10.2 v1(10.29,10.04)
GPIO0: length 23.9
  TOP w0.115: U1.2 5.08,29.25 4.52,29.81 4.52,41.43 3.2,42.75 3.2,47.04 1.61,48.63 J0.1
GPIO1: length 21.9
  TOP w0.115: J0.2 2.8,45.9 2.8,42.6 4.17,41.23 4.17,29.52 4.84,28.85 U1.3
GPIO2: length 17.3
  TOP w0.115: J0.4 3.85,39.77 3.85,29.29 4.69,28.45 U1.4
GPIO3: length 15.2
  TOP w0.115: U1.5 4.58,28.05 3.53,29.1 3.53,37.55 J0.5
GPIO4: length 13.2
  TOP w0.115: U1.6 4.41,27.65 3.18,28.87 3.18,35.35 J0.6
GPIO5: length 11.1
  TOP w0.115: U1.7 4.25,27.25 2.86,28.65 2.86,33.14 J0.7
GPIO6: length 6.6
  TOP w0.115: J0.9 4.07,26.85 U1.8
GPIO7: length 5.7
  TOP w0.115: J0.10 1.83,26.55 6.6,26.55 6.7,26.45 U1.9
GPIO8: length 6.3
  TOP w0.115: J0.11 2.18,24.23 3.78,25.83 4.75,25.83 4.99,25.59 6.64,25.59 6.7,25.65 U1.11
GPIO9: length 8
  TOP w0.115: J0.12 2.32,22.4 2.32,23.25 2.75,23.68 2.75,24.24 3.96,25.45 4.64,25.45 4.84,25.25 U1.12
GPIO10: length 12.9
  TOP w0.115: U1.13 4.9,24.85 4.79,24.96 4.67,24.96 4.51,25.12 4.12,25.12 3.08,24.08 3.08,23.23 v1(2.78,22.93)
  BOTTOM w0.115: J0.14 2.99,17.99 2.99,22.72 v1(2.78,22.93)
GPIO11: length 14.6
  TOP w0.115: U1.14 5.36,24.45 5.28,24.53 4.45,24.53 v1(4.34,24.64)
  BOTTOM w0.115: v1(4.34,24.64) 4.33,24.64 3.32,23.63 3.32,15.78 J0.15
GPIO12: length 16.9
  TOP w0.115: U1.15 7.9,23.66 7.75,23.51 4.27,23.51 v1(4.21,23.57)
  BOTTOM w0.115: v1(4.21,23.57) 3.7,23.06 3.7,15.32 2.87,14.49 2.87,12.79 J0.16
GPIO13: length 20.4
  TOP w0.115: J0.17 1.61,9.96 2.93,11.28 2.93,18.26 2.7,18.49 2.7,22.18 3.55,23.03 8.13,23.03 8.3,23.2 U1.16
GPIO14: length 25.6
  TOP w0.115: J0.19 2.69,4.99 2.69,10.59 3.31,11.22 3.31,18.41 3.1,18.63 3.1,22.07 3.71,22.68 8.29,22.68 8.7,23.09 U1.17
GPIO15: length 28.3
  TOP w0.115: U1.18 9.1,23.05 8.38,22.33 3.91,22.33 3.5,21.93 3.5,18.78 3.7,18.58 3.7,10.89 v1(3.17,10.36)
  BOTTOM w0.115: J0.20 2.76,2.52 2.76,4.79 2.71,4.84 2.71,9.9 v1(3.17,10.36)
GPIO16: length 26.1
  TOP w0.115: U1.27 12.7,23.2 13.2,22.7 14.91,22.7 17.36,20.25 17.36,10.56 17.93,9.99 17.93,5.6 18.32,5.21 18.32,3.47 19.39,2.4 J0.21
GPIO17: length 23.3
  TOP w0.115: J0.22 18.64,4.66 18.64,5.39 18.29,5.73 18.29,10.21 17.8,10.71 17.8,20.33 14.98,23.15 13.46,23.15 13.1,23.52 U1.28
GPIO18: length 18
  TOP w0.115: U1.29 14.23,24.45 14.38,24.3 14.38,24.25 18.18,20.45 18.18,10.96 19.39,9.75 J0.24
GPIO19: length 16
  TOP w0.115: v1(16.69,22.69) 16.65,22.73 16.47,22.73 14.35,24.85 U1.30
  BOTTOM w0.115: J0.25 17.54,13.38 17.54,20.74 16.69,21.59 v1(16.69,22.69)
GPIO20: length 14.2
  TOP w0.115: v1(17.73,21.65) 17.83,21.75 17.83,22.3 16.86,23.27 16.41,23.27 14.43,25.25 U1.31
  BOTTOM w0.115: J0.26 17.92,15.54 17.92,21.46 v1(17.73,21.65)
GPIO21: length 12.5
  TOP w0.115: v1(17.34,23.5) 17.18,23.66 16.46,23.66 14.47,25.65 U1.32
  BOTTOM w0.115: J0.27 18.29,17.71 18.29,23.14 17.93,23.5 v1(17.34,23.5)
GPIO22: length 8
  TOP w0.115: U1.34 13.85,26.4 15.09,26.4 17.42,24.07 17.81,24.07 18.35,23.53 18.36,23.53 18.68,23.21 18.68,22.4 J0.29
GPIO26_ADC0: length 6.1
  TOP w0.115: J0.31 18.03,28.13 14.37,28.13 14.29,28.05 U1.38
GPIO27_ADC1: length 5.9
  TOP w0.115: J0.32 18.53,28.45 U1.39
GPIO28_ADC2: length 9.8
  TOP w0.115: U1.40 17.25,28.85 17.99,29.59 17.99,33 J0.34
QSPI_SCLK: length 5.1
  TOP w0.115: U1.52 9.5,30.9 8.49,31.91 8.49,32.67 8.92,33.09 9.12,33.09 9.36,33.33 9.36,33.75 9.16,33.95 U3.6
QSPI_SD0: length 3.9
  TOP w0.115: U1.53 9.1,30.9 8.04,31.97 8.04,33.2 8.29,33.44 U3.5
QSPI_SD1: length 6.6
  TOP w0.115: U3.2 5.25,34.44 5.11,34.31 5.11,33.1 5.63,32.58 6.28,32.58 6.47,32.38 6.88,32.38 7.23,32.03 7.23,31.88 8.3,30.81 U1.55
QSPI_SD2: length 5.1
  TOP w0.115: U1.54 8.7,30.9 7.62,31.98 7.62,32.27 6.78,33.12 6.78,33.59 6.43,33.95 U3.3
QSPI_SD3: length 5.8
  TOP w0.115: U1.51 9.9,30.9 8.9,31.91 8.9,32.52 9.16,32.78 9.45,32.78 9.71,33.03 9.71,33.96 9.23,34.44 U3.7
QSPI_SS: length 7.2
  TOP w0.115: 6.6,31.7 6.78,31.7 7.19,31.3 7.9,30.58 U1.56 ; 6.6,31.7 6.6,31.71 6.07,32.24 5.56,32.24 4.96,32.84 4.82,32.98 4.82,34.62 5.14,34.95 U3.1 ; 6.6,31.7 R11.2
RUN: length 8.9
  TOP w0.15: U1.26 12.3,23.08 13.22,22.16 v1(14.65,22.16)
  BOTTOM w0.15: J0.30 16.72,24.23 v1(14.65,22.16)
SR_VLX: length 2.8
  TOP w0.23: 8.03,14.04 U19.A6
  TOP w0.25: 8.03,14.04 7.86,14.04 7.74,13.92
  TOP w0.3: 7.74,13.92 6.88,13.92 5.92,12.96 L8.1
SWCLK: length 4.5
  TOP w0.115: J2.1 12.01,20.73 12.01,21.84 11.7,22.15 11.7,22.99 11.5,23.19 U1.24
SWDIO: length 6.5
  TOP w0.115: U1.25 11.9,23.25 12,23.15 12,22.55 13.26,21.29 14.42,21.29 15.91,19.8 J2.3
USB_DM: length 19.3
  TOP w0.1: J1.2 11.15,45.93 10.95,45.73 10.95,44.87 9.56,43.48 9.56,36.43 10.5,35.49 10.5,33.81 10.94,33.37 11.28,33.37 11.65,33 11.65,32.68 R13.1
  TOP w0.145: v1(11.15,48.05) J1.2
  BOTTOM w0.145: TP2.1 11.15,49.45 v1(11.15,48.05)
USB_DMX: length 1.5
  TOP w0.145: U1.46 R13.2
USB_DP: length 19.6
  TOP w0.1: R12.1 11.45,32.68 11.45,32.92 11.2,33.17 10.86,33.17 10.3,33.73 10.3,35.41 9.36,36.35 9.36,43.56 10.75,44.95 10.75,45.68 10.57,45.86 10.57,46.6 J1.3
  TOP w0.145: J1.3 v1(10.5,48.05)
  BOTTOM w0.145: TP3.1 10.5,48.8 v1(10.5,48.05)
USB_DPX: length 1.6
  TOP w0.145: U1.47 11.5,31.57 R12.2
VOUT_3P3: length 13.6
  TOP w0.23: U19.M1 12.72,11.84 12.72,11.61 13.03,11.3 C244.1 ; U19.E7 9.68,14.49 9.71,14.49 9.71,15.55 9.75,15.59
  TOP w0.3: R80.1 13.16,10.69 13.03,10.82 C244.1 13.29,10.8 13.71,10.8 13.76,10.85 v2(14.28,10.85) ; 9.86,15.87 9.75,15.76 9.75,15.59 ; 9.86,15.87 C243.1 ; 9.86,15.87 10.3,16.31 10.76,16.31 v2(10.82,16.37)
  BOTTOM w0.3: v2(14.28,10.85) 14.62,11.19 14.62,11.89 12.38,14.13 12.38,15.35 11.38,16.35 10.84,16.35 v2(10.82,16.37)
VOUT_CORE: length 11.9
  TOP w0.12: U19.C6 9.17,14.37 9.17,15.19 9.12,15.24
  TOP w0.127: v2(9.91,13.27) 9.83,13.19 9.58,13.19 U19.D3
  TOP w0.2: v2(8.98,15.55) 9.12,15.41 9.12,15.24
  TOP w0.23: U19.G4 9.93,13.28 v2(9.91,13.27)
  TOP w0.3: v2(8.28,12.89) 8.23,12.93 7.83,12.93 7.49,12.6 C255.1 6.91,12.88 v1(7.04,13.01)
  TOP w0.4: C248.1 8.93,16.36 8.98,16.31 v2(8.98,15.55)
  BOTTOM w0.25: v2(8.98,15.55) 9.28,15.25 9.28,14.49 9.03,14.24 8.07,14.24 7.86,14.03 7.7,14.03 7.52,13.85
  BOTTOM w0.3: v2(9.91,13.27) 9.53,12.89 v2(8.28,12.89) ; 7.52,13.85 7.04,13.37 v1(7.04,13.01)
VOUT_LN: length 21.3
  TOP w0.12: 9.28,12.09 9.68,12.49 ; U19.F2 U19.G1
  TOP w0.129: 9.68,12.49 U19.E2
  TOP w0.15: 9.63,11.22 9.28,11.57 9.28,12.09 ; 9.63,11.22 C252.1 ; 9.63,11.22 9.75,11.1
  TOP w0.2: U19.D6 9.34,14.03 9.34,13.97 9.49,13.81 v2(9.49,13.68)
  TOP w0.23: 9.63,11.16 C252.1 ; 9.63,11.16 9.82,11.16 10.39,11.73 10.39,11.82 10.48,11.91 U19.G1 ; 9.63,11.16 9.65,11.17 9.65,11.5 10.08,11.93 U19.F1
  TOP w0.25: v2(15.3,11.26) 15.3,11.3 FB9.1
  TOP w0.3: v1(7.56,11.95) 7.56,11.84 C246.1 8.68,11.15 8.76,11.15
  TOP w0.4: C246.1 8.6,10.79 v2(8.6,10.38) ; 8.76,11.15 C252.1
  BOTTOM w0.25: 14.14,9.17 13.69,9.17 13.66,9.14 12.09,9.14
  BOTTOM w0.3: v1(7.56,11.95) 7.69,12.08 7.69,13.08 8.03,13.42 9.24,13.42 v2(9.49,13.68) 9.48,13.69 9.46,13.69 9.44,13.71 ; 14.14,9.17 15.3,10.33 v2(15.3,11.26) ; v2(8.6,10.38) 8.66,10.38 9.09,9.95 9.09,9.55 9.39,9.25 11.98,9.25 12.09,9.14
  BOTTOM w0.4: 9.49,13.66 v2(9.49,13.68)
VSYS: length 10.3
  TOP w0.2: R5.1 17.17,35.55 v1(17.53,35.91)
  TOP w0.3: 18.6,46.3 J0.39 19.7,46
  BOTTOM w0.4: v1(17.53,35.91) 17.53,40.26 v1(15.47,42.31)
WL_CLK: length 24.9
  TOP w0.115: U1.41 15.5,29.25 16.55,30.3 v1(16.91,30.3) 16.91,30.75 ; Q1.2 17.49,31.33 16.91,30.75 ; 16.91,30.75 16.82,30.83 R6.1 ; U19.M7 12.94,14.95 12.94,15.44 13.53,16.03 13.53,16.33 13.92,16.72 14.16,16.72 v2(14.92,17.48)
  BOTTOM w0.115: v1(16.91,30.3) 16.91,27.09 13.73,23.91 13.73,21.61 14.99,20.35 14.99,17.55 v2(14.92,17.48)
WL_CS: length 21.9
  TOP w0.1: v2(12.5,17.27) 12.48,17.25 12.44,17.25 12.11,16.93 12.11,16.17 11.98,16.04 11.98,15.43 11.35,14.8 11.35,14.55 U19.J7
  TOP w0.115: Q1.1 16.49,31.69 16.54,31.64 v1(16.54,31.47) ; U1.37 15.26,27.65 v1(15.3,27.61)
  BOTTOM w0.115: v1(16.54,31.47) 16.41,31.34 16.41,30.12 15.74,29.45 15.74,28.05 v1(15.3,27.61) 15.02,27.33 15.02,26.59 12.22,23.79 12.22,19.14 12.5,18.86 v2(12.5,17.27)
WL_D: length 19.6
  TOP w0.1: U19.L6 U19.L7 12.69,15.09 12.69,15.63 13.29,16.23 13.29,16.55 13.5,16.76 13.5,16.89 13.53,16.92 R87.2 13.57,16.97 ; R88.2 12.34,17.67 12.79,17.67 12.93,17.53 12.96,17.53 13.18,17.31 13.3,17.31 13.57,17.04 13.57,16.97 ; v2(13.83,17.47) 13.83,17.21 13.59,16.97 13.57,16.97
  TOP w0.115: U1.36 14.14,27.25 14.23,27.34 14.85,27.34 15.32,26.87 v1(15.49,26.87)
  BOTTOM w0.115: v1(15.49,26.87) 15.36,26.74 15.36,26.44 12.59,23.67 12.59,19.26 13.85,18 13.85,17.49 v2(13.83,17.47)
WL_GPIO0: length 39.8
  TOP w0.1: v2(12.52,16.67) 12.52,16.22 12.22,15.92 12.22,15.34 11.58,14.7 11.58,14.39 11.28,14.09 U19.J6 11.26,14.09 ; R3.1 7.11,43.3
  TOP w0.15: 7.11,43.3 6.8,43.3 6.8,43.3 v1(6.66,43.3)
  BOTTOM w0.15: v2(12.52,16.67) 12.4,16.67 11.89,17.18 11.03,17.18 10.57,17.64 7.69,17.64 6.64,16.59 6.11,16.59 4.49,18.21 4.49,22.41 5.58,23.5 5.58,24.97 4.69,25.86 4.69,28.33 5.67,29.31 5.67,42.32 v1(6.66,43.3)
WL_GPIO1: length 48.5
  TOP w0.15: v1(8.29,44.93) 8.06,44.71 R8.1 ; U2.13 11.77,42.23 11.58,42.42 10.69,42.42 10.36,42.74 v1(10.36,43.08) ; U19.H6 10.88,13.88 10.82,13.83 10.82,13.75 v2(10.81,13.74)
  BOTTOM w0.15: v1(10.36,43.08) 9.82,43.08 9.79,43.11 7.89,43.11 ; v2(10.81,13.74) 10.69,13.74 9.66,14.77 9.66,15.48 9.13,16.01 8.79,16.01 8.72,15.94 8.08,15.94 7.73,16.29 7.73,16.4 7.55,16.58 7.09,16.58 6.67,16.16 6.09,16.16 5.84,16.41 5.83,16.41 4.11,18.13 4.11,22.71 4.36,22.96 4.37,22.96 5.18,23.77 5.18,24.84 4.36,25.66 4.36,41.91 6.32,43.87 7.13,43.87 7.89,43.11 ; 8,43 7.89,43.11 ; 8,43 8,43.95 8.29,44.24 v1(8.29,44.93) ; 8,43 TP4.1
WL_GPIO2: length 24.2
  TOP w0.115: R1.1 17.03,25.92 16.55,25.92 16.41,25.78 v1(16.38,25.78) 16.64,26.04 R10.2
  TOP w0.23: U19.L5 11.79,13.69 11.75,13.64 v2(11.74,13.64)
  BOTTOM w0.15: v2(11.74,13.64) 11.74,14.07 11.75,14.07 11.75,14.39 10.4,15.74 10.4,16.55 10.66,16.81 11.67,16.81 12.24,16.24 14.63,16.24 16.44,18.05 16.45,18.05 17.19,18.79 17.19,20.34 16.41,21.11 14.86,21.11 14.13,21.84 14.13,22.62 16.38,24.87 v1(16.38,25.78)
WL_ON: length 22.7
  TOP w0.1: U19.G6 10.48,14.09 10.48,14.56 10.97,15.05 10.97,15.1 11.54,15.67 11.54,15.98 11.26,16.26 11.26,16.53 11.02,16.77 11.02,17.42 v2(11.21,17.61) 9.58,17.61 9.41,17.44 9.41,14.36 U19.E6
  TOP w0.15: U1.35 v1(14.55,26.85) ; 11.21,17.62 v2(11.21,17.61)
  BOTTOM w0.15: v1(14.55,26.85) 11.74,24.04 11.74,22.74 10.79,21.79 10.44,21.79 9.63,20.98 9.63,18.83 9.99,18.47 10.35,18.47 v2(11.21,17.61)
XIN: length 4.5
  TOP w0.115: U1.20 9.9,22.98 8.16,21.25 C16.1 7.05,21.25 X1.1
XOUT: length 3.6
  TOP w0.115: U1.21 10.3,22.9 8.87,21.47 R14.1
XR: length 5.4
  TOP w0.115: R14.2 8.88,20.19 8.88,19.52 8.55,19.19 C17.1 7.99,19.19 7.82,19.02 5.72,19.02 4.96,19.79 X1.3
XTAL_VDD: length 2.6
  TOP w0.15: FB9.2 14.45,12.15 14.45,12.25 14.13,12.57 13.63,12.57 C251.1
  TOP w0.23: 13.63,12.57 13.62,12.58 13.26,12.58 12.96,12.88 U19.M3
N1283798: length 9.6
  TOP w0.115: R3.2 7.64,43.54 7.31,43.87 6.83,43.87 6.2,44.5
  TOP w0.15: D2.2 5.55,45.15 6.2,44.5 ; v1(6.86,39.31) 7.29,39.74 7.29,42.41 7.64,42.77 7.64,43.29 R3.2
  BOTTOM w0.2: v1(6.86,39.31) 7.69,39.31 TP5.1
N1286133: length 1.4
  TOP w0.2: Q1.3 16.87,34.19 16.87,34.84 16.65,35.06 R5.2
N1327876: length 14.1
  TOP w0.15: 5.93,38.53 6.05,38.4 v1(6.83,38.4) ; 5.93,38.53 SW1.1 ; 5.93,38.53 SW1.2 ; R11.1 5.18,31.7 v1(5.02,31.86)
  TOP w0.2: SW1.1 5.93,36.55 v1(5.07,35.69)
  BOTTOM w0.2: v1(6.83,38.4) 6.83,37.24 7.57,36.5 TP6.1 ; v1(5.07,35.69) 5.07,31.9 v1(5.02,31.86)
N2601398: length 5.3
  TOP w0.115: C249.1 11.98,10.01 C250.1 11.98,9.93 arc(11.92,9.62) C247.2 arc(11.61,9.26) 11.46,9.23 7.99,9.23 7.87,9.35 FL1.O
N2601406: length 1.1
  TOP w0.115: U19.K1 11.68,11.91 11.76,11.83 11.76,11.44 11.98,11.22 C249.2
N2601542: length 0.5
  TOP w0.115: C250.2 11.45,10.02 L9.1
N2601582: length 1.1
  TOP w0.115: L9.2 11.45,11.14 11.37,11.22 11.37,11.74 11.28,11.84 U19.J1
N2601656: length 3.5
  TOP w0.15: 14.06,13.93 14.13,13.93 14.68,13.38 14.88,13.38 15.15,13.12 C257.1 ; 14.06,13.93 13.84,13.72 13.41,13.72 12.98,13.28 U19.M4 ; 14.06,13.93 X2.1
N2601706: length 1.9
  TOP w0.2: 15.1,15.88 15.1,14.73 X2.3 ; 15.1,15.88 14.79,15.88 R81.1 ; 15.1,15.88 C258.1
N2601714: length 3.2
  TOP w0.15: U19.M5 12.93,13.69 13.46,14.22 13.46,15.15 R81.2
N2606814: length 1.5
  TOP w0.5: C262.1 C261.1
N2606818: length 6.1
  TOP w0.115: R86.1 3.66,4.56 arc(3.68,4.45) C272.1 ; 6,4 4.29,4 arc(4.11,4.04) 3.96,4.14 3.74,4.36
  TOP w0.2: 3.74,4.36 C272.1
  TOP w0.5: C262.2 6,4
N2606882: length 1.5
  TOP w0.5: C271.1 C260.2
N2610223: length 1.5
  TOP w0.15: C20.1 10.75,38.13 11.07,38.13 11.27,38.33 U2.1
N2612153: length 1.7
  TOP w0.15: R20.1 R21.2 12.31,37.87 12.27,37.91 U2.3
N2624340: length 6.1
  TOP w0.115: R86.2 3.66,8.6 3.67,8.61 arc(3.91,9.2) 4.51,9.45 FL1.I
N2651978: length 3.4
  TOP w0.1: R87.1 13.01,16.32 12.45,15.76 12.45,15.22 11.95,14.72 11.93,14.72 11.81,14.6 11.81,14.26 11.68,14.13 U19.K6
N2652088: length 2.4
  TOP w0.1: R88.1 11.75,16.42 11.75,15.56 11.31,15.12 11.31,15.1 11.14,14.93 11.14,14.89 11.05,14.8 11.05,14.65 10.88,14.48 U19.H7

## Copper pours and planes (outline as drawn; the poured copper is in the pictures)
1V1 on TOP: 11.8,29.95 11.8,29.35 8.2,29.35 8.2,24.75 11.15,24.75 11.15,25.25 8.7,25.25 8.7,28.85 12.4,28.85 12.4,29.95
3V3 on TOP: 7.6,24.15 13.4,24.15 13.4,29.95 12.6,29.95 12.6,28.85 13,28.85 13,27.65 12.3,27.65 12.3,25.25 11.3,25.25 11.3,24.6 8.05,24.6 8.05,29.5 11.6,29.5 11.6,29.95 7.7,29.95 7.6,30.05 7.6,30.93 5.93,30.93 5.93,30.25 6.05,30.25 6.15,30.15 6.15,29.55 7.6,29.55
3V3 on TOP: 13.47,37.97 13.47,38.92 12.62,38.92 12.6,36.81 12.83,36.61 12.83,32.34 13.77,31.4 14.6,31.4 14.6,34.41 14.4,34.61 14.4,36.9 14.6,36.9 14.6,35.93 15.4,35.93 15.4,37.3 20.2,37.3 20.2,41.02 17.99,41.02 17.99,38.35 16.03,37.98
3V3 on BOTTOM: 12.04,33.87 14.6,33.87 14.6,29.14 10.6,25.14 10.6,21.82 10.4,21.81 9.65,21.01 9.64,19.95 6.52,16.81 6.25,16.81 5.18,17.88 5.18,27.38 11.64,33.84 12.01,33.84
GND on TOP: 9.98,41.76 10.93,41.76 10.93,41.07 14.74,41.08 15.42,40.39 15.42,39.74 14.81,39.12 10.94,39.12 10.94,38.45 9.98,38.44
GND on TOP: 0.8,50.2 9.84,50.2 9.84,36.75 20.2,36.75 20.2,0.8 17.14,0.8 16.6,0.5 4.4,0.5 3.88,0.8 0.8,0.8 0.8,48.07 1.61,48.07 1.64,48.07 1.73,48.13 1.71,48.24 1.41,48.54 1.41,48.65 0.8,48.65 ; 3 cut-outs
GND on BOTTOM: 0.8,50.2 20.2,50.2 20.2,38 19.1,38 18.4,37.3 18.4,26.2 18.9,25.7 20.2,25.7 20.2,0.8 17.14,0.8 16.6,0.5 4.4,0.5 3.88,0.8 0.8,0.8 ; 1 cut-out
GND on GNDT: 0.5,50.5 20.5,50.5 20.5,38 17.6,38 17.6,37.4 16.6,37.4 14.5,35.3 14.5,31.3 13.3,31.3 12.8,30.8 12.8,30.1 13,29.9 13.4,29.9 13.5,30 13.5,30.4 13.6,30.5 15.2,30.5 16.1,31.4 16.1,33.3 16.2,33.4 17.71,33.4 17.71,29.91 16.9,29.1 12.5,29.1 12.1,28.7 12.1,28.1 12.5,27.7 14.4,27.7 14.5,27.8 17.7,27.8 18,27.5 18,26.2 18.1,26.1 20.5,26.1 20.5,0.8 17.14,0.8 16.6,0.5 4.4,0.5 3.88,0.8 0.5,0.8 ; 3 cut-outs
GND on GNDT: 14.7,31.1 13.4,31.1 13,30.7 13,30.1 13.3,30.1 13.3,30.4 13.6,30.7 15.2,30.7 15.9,31.4 15.9,33.4 16.1,33.6 17.86,33.6 17.86,37.2 16.7,37.2 14.7,35.2
GND on GNDT: 12.67,28.97 12.3,28.6 12.3,28.2 12.6,27.9 14.3,27.9 14.4,28 17.9,28 18.2,27.7 18.2,26.3 20.5,26.3 20.5,37.8 17.86,37.8 17.86,29.76 17.07,28.97
GND on GNDB: 0.5,50.5 20.5,50.5 20.5,33 18.4,33 18.4,30.8 20.5,30.8 20.5,0.8 17.14,0.8 16.6,0.5 4.4,0.5 3.88,0.8 0.5,0.8 ; 1 cut-out
VBUS on TOP: 11.6,44.6 16.4,44.6 19,47.3 20.2,47.3 20.2,50.2 14.7,50.2 14.7,45.5 12.2,45.5 12,45.7 12,47.5 11.6,47.5
VSYS on TOP: 12.6,41.21 13.51,41.2 13.51,42.01 15.03,42.03 15.13,42.12 20.2,42.12 20.2,47.1 19.1,47.1 16.5,44.4 12.72,44.4 12.72,43.4 12.6,43.4
N1248345 on TOP: 13.63,41.77 13.63,41.15 14.88,41.15 15.34,40.58 17.65,40.58 17.65,41.55 17.66,41.55 17.44,41.77
N1248352 on TOP: 13.62,39.03 13.62,38.43 16.2,38.43 17.66,38.68 17.65,39.63 15.35,39.63 14.87,39.03

## Text on the board
BOTTOM: L4 - BOTTOM
Ref Des/Assembly Bottom: BOTTOM ASSEMBLY
Package Geometry/Pastemask Bottom: BOTTOM PASTE
Ref Des/Silkscreen Bottom: Abracon | licensed from | IC:20953-PICOW | Uses technology | FCC ID:2ABCB-PICOW | GND | GP17 | GP16 | VBUS | VSYS | 3V3_EN | 3V3 | ADC_VREF | GP28_A2 | AGND | GP27_A1 | GP26_A0 | RUN | GP22 | GP21 | GP20 | GP19 | GP18 | GP14 | GP15 | GP0 | GP1 | GP2 | GP3 | GP4 | GP5 | GP6 | GP7 | GP8 | GP9 | GP10 | GP11 | GP12 | GP13 | TP3 | TP5 | TP4 | TP6 | TP1 | TP2 | SWCLK | SWDIO | BOTTOM LEGEND
User.Comments: TOP SOLDER MASK | BOTTOM SOLDER MASK
TOP: L1 - TOP
Ref Des/Assembly Top: TOP ASSEMBLY
Package Geometry/Pastemask Top: TOP PASTE
Ref Des/Silkscreen Top: R3 | 1 | 2 | LED | USB | DEBUG | 39 | BOOTSEL | Raspberry Pi Pico W c 2022 | TOP LEGEND
GNDT: L2 GND
GNDB: L3 GND
DIMENSION: 2mm ROUTE | (typ)
PINOUT: SWCLK | GND | SWDIO | TP1-6 ARE ON | REVERSE SIDE | TP4 | TP5 | TP6 | TP1 | TP3 | TP2 | 40 | 39 | 38 | 37 | 36 | 35 | 34 | 33 | 32 | 31 | 30 | 29 | 28 | 27 | 26 | 25 | 24 | 23 | 22 | 21 | 1 | 2 | 3 | 4 | 5 | 6 | 7 | 8 | 9 | 10 | 11 | 12 | 13 | 14 | 15 | 16 | 17 | 18 | 19 | 20
SMT_FOOTPRINT: E | F | G | Centred at 11.0841,19.8 | E PAD : 1.5748mm square | F PAD : 1.5748mm diameter circle | Centre at 13.6241,19.8 | G PAD : 1.5748mm diameter circle | Centre at 16.1641,19.8 | A = (7.775, 49.5) | B = (13.225, 49.5) | C = (8.075, 46.47) | D = (12.925, 46.47) | A | C | D | B | ORIGIN BOTTOM LEFT AS INDICATED | TEST POINT CENTERS SHOWN | TEST POINTS ARE 1.5x1.5mm | WITH 0.3mm CORNER RADIUS | A, B, C, D PAD CENTERS SHOWN | A, B PAD GEOMETRY: | B, C PAD GEOMETRY: | 1.1mm | 1.05mm | 1.8mm | 1.45mm | RADIUS = 0.55mm | RADIUS = 0.525mm | (8,43) | (8,40.5) | (8,38) | (9.5,49.8) | (11.5, 49.8) | (10.5,46.5)
User.7: *  SURFACE - 0 MM | L1 TOP CONDUCTOR - 0.04 MM | *  DIELECTRIC - 0.073 MM | L2 GNDT CONDUCTOR - 0.031 MM | *  DIELECTRIC - 0.66 MM | L3 GNDB CONDUCTOR - 0.031 MM | L4 BOTTOM CONDUCTOR - 0.04 MM | DESIGN CROSS SECTION CHART | ___________________________ | TOTAL THICKNESS 0.948 MM | 1-4 | 90Ohm Diff 0.1 /0.1 | 50ohm single ended 0.115mm | DESIGN FILES COPYRIGHT RASPBERRY PI 2022
User.8: NONE | DRAWING / MFR. DETAILS | NOTE: | ADJUST MICROSTRIP USB | TRACES FOR 90R +/- 15% | BOARD HAS CASTELLATED | EDGE PINS | AREA FOR SERIAL No. | LASER ETCHED ON BOTTOM | AREA FOR MANUF./UL CODES | PLACE ON BOTTOM IN LEGEND
